# Altium PCB ETRX_Shield_gran.PcbDoc (part 2 of 2)
Units mm, origin at the board's own origin, x right, y up, seen from the top; angles counter-clockwise.
Board outline 80 x 60 mm, 4 copper layers (Top Layer, GND, PWR, Bottom Layer), stack 1.506 mm thick; 134 components, 122 nets, 503 pads, 34 vias.
Unrouted connection lines stored in the file: 347.
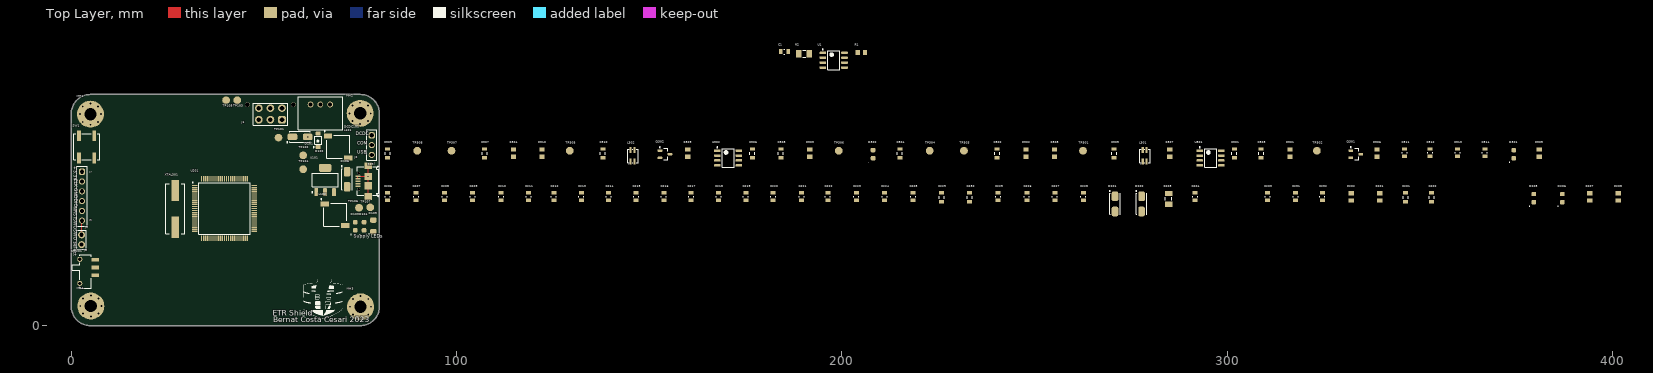
[diagram p0: Top Layer view]

## Part data (continued)
L301 L302: library part CMC-51uH-125mA, "Common Mode Noise Filter for CAN DCMR Class3 Compliance", Supplier Part Number 1=81-DLW32SH510XF2L, Specifications sheet=https://www.murata.com/products/productdata/8804914298910/QFLC9127.pdf?1681702277000, Supplier 1=Mouser
Q301 Q302: library part TRT-NPN-0.5/45-SOT23, "ON Semi BC817-25LT1G NPN Bipolar Transistor; 0.5 A; 45 V; 3-Pin SOT-23", Case/Package=SOT-23-3, Collector Base Voltage (VCBO)=50V, Collector Emitter Breakdown Voltage=45V, Collector Emitter Saturation Voltage=700mV, Current Rating=500mA, Emitter Base Voltage (VEBO)=5V, Frequency=100MHz, Package Quantity=1, Power Dissipation=300mW, Supplier Part Number 1=BC817-25LT1GOSCT-ND, .Creator=GP, Category=Transistor, Collector Emitter Voltage (VCEO)=45V, Collector-emitter Voltage-Max=700mV, ComponentLink1Description=Datasheet, ComponentLink2Description="Where buy it", ComponentLink3Description=https://datasheet.ciiva.com/27748/2010413-27748829.pdf?src-supplier=Jameco, ComponentLink3URL=https://datasheet.ciiva.com/27748/2010413-27748829.pdf?src-supplier=Jameco, ComponentLink4Description=https://datasheet.ciiva.com/15138/getdatasheetpartid-38405-15138602.pdf?src-supplier=Verical, ComponentLink4URL=https://datasheet.ciiva.com/15138/getdatasheetpartid-38405-15138602.pdf?src-supplier=Verical, ComponentLink5Description=https://datasheet.ciiva.com/1196/bc817-16lt1-d-1196558.pdf?src-supplier=Element14, ComponentLink5URL=https://datasheet.ciiva.com/1196/bc817-16lt1-d-1196558.pdf?src-supplier=Element14, ComponentLink6Description=https://datasheet.ciiva.com/22641/bc817-16lt1-d-22641013.pdf?src-supplier=Farnell, ComponentLink6URL=https://datasheet.ciiva.com/22641/bc817-16lt1-d-22641013.pdf?src-supplier=Farnell, ComponentLink7Description=https://datasheet.ciiva.com/22664/bc817-16lt1-d-22664204.pdf?src-supplier=Element14, ComponentLink7URL=https://datasheet.ciiva.com/22664/bc817-16lt1-d-22664204.pdf?src-supplier=Element14, ComponentLink8Description=https://datasheet.ciiva.com/22664/1842041-22664101.pdf?src-supplier=Element14, ComponentLink8URL=https://datasheet.ciiva.com/22664/1842041-22664101.pdf?src-supplier=Element14, ComponentLink9Description=https://datasheet.ciiva.com/4722/bc817-16lt1-d-104560-4722229.pdf?src-supplier=Mouser, ComponentLink9URL=https://datasheet.ciiva.com/4722/bc817-16lt1-d-104560-4722229.pdf?src-supplier=Mouser, ComponentLink10Description=https://datasheet.ciiva.com/1195/bc817-16lt1-d-1195763.pdf?src-supplier=Element14, ComponentLink10URL=https://datasheet.ciiva.com/1195/bc817-16lt1-d-1195763.pdf?src-supplier=Element14, ComponentLink11Description=https://datasheet.ciiva.com/1195/bc817-16lt1-d-1195764.pdf?src-supplier=Element14, ComponentLink11URL=https://datasheet.ciiva.com/1195/bc817-16lt1-d-1195764.pdf?src-supplier=Element14, ComponentLink12Description=https://datasheet.ciiva.com/11197/bc817-16lt1-d-11197514.pdf?src-supplier=Avnet, ComponentLink12URL=https://datasheet.ciiva.com/11197/bc817-16lt1-d-11197514.pdf?src-supplier=Avnet, ComponentLink13Description=https://datasheet.ciiva.com/25996/bc817-16lt1-d-25996327.pdf?src-supplier=Avnet+Europe, ComponentLink13URL=https://datasheet.ciiva.com/25996/bc817-16lt1-d-25996327.pdf?src-supplier=Avnet+Europe, ComponentLink14Description=https://datasheet.ciiva.com/976/bc817-16lt1-d-976357.pdf?src-supplier=Digi-Key, ComponentLink14URL=https://datasheet.ciiva.com/976/bc817-16lt1-d-976357.pdf?src-supplier=Digi-Key, ComponentLink15Description=https://datasheet.ciiva.com/976/bc817-16lt1-d-976358.pdf?src-supplier=Digi-Key, ComponentLink15URL=https://datasheet.ciiva.com/976/bc817-16lt1-d-976358.pdf?src-supplier=Digi-Key, ComponentLink16Description=https://datasheet.ciiva.com/976/bc817-16lt1-d-976356.pdf?src-supplier=Digi-Key, ComponentLink16URL=https://datasheet.ciiva.com/976/bc817-16lt1-d-976356.pdf?src-supplier=Digi-Key, Contact Plating=Tin,Matte, Element Configuration=Single, Gain Bandwidth Product=100MHz, Halogen Free="Halogen Free", Height=0.94mm, hFE Min=160, Lead Free="Lead Free", Length=2.9mm, Max Breakdown Voltage=45V, Max Collector Current=500mA, Max Frequency=100MHz, Number of Elements=1, Number of Pins=3, Pricing 1="1=0,20000, 10=0,18500, 100=0,10080, 500=0,06204, 1000=0,04229 (USD)", Radiation Hardening=No, REACH SVHC="No SVHC", RoHS Compliant=Yes, Series=-, Supplier 1=Digi-Key, Transition Frequency=100MHz, Width=1.3mm
R1: library part "R549k - 0805"
R2: library part R68k-1206FTK, "Resistor, AS 1206 68k1% 250mW TC100", Manufacturer=Bourns, Resistance=68kR, Supplier Part Number 1=16AH0632, .Creator=DO, Category="Chip SMD Resistors", ComponentLink1Description="Where buy it", ComponentLink1URL=https://www.mouser.es/ProductDetail/Bourns/CR1206AFX-6802EAS?qs=PzGy0jfpSMtMA5jyzS7M7w%3D%3D, ComponentLink2Description=Datasheet, ComponentLink2URL=https://www.mouser.es/datasheet/2/54/cr_a_as-1858644.pdf, Manufacturer part number=CR1206AFX-6802EAS, Pricing 1="1=0,01100, 25=0,01100, 50=0,01100, 100=0,01100, 250=0,01100, 500=0,01100 (USD)", RoHS=Yes, Stock 1=4700, Supplier 1=Newark
R101 R103 R305 R308: library part R470-0805FTK, "Res Thick Film 0805 470 Ohm 1% 1/8W ±100ppm/°C Molded SMD SMD Paper Tape on Plastic Reel", Case Code (Imperial)=0805, Case Code (Metric)=2012, Manufacturer 1=Bourns, Max Operating Temperature=155°C, Max Power Dissipation=125mW, Min Operating Temperature=-55°C, Resistance=470R, Resistance Tolerance=1%, Resistor Type="Thick Film", Temperature Coefficient=100ppm/°C, Voltage Rating=150V, .Creator=DR, Case/Package=0805, Category="Chip SMD Resistors", ComponentLink1Description=https://datasheet.ciiva.com/11808/0900766b80fcdb72-11808686.pdf?src-supplier=RSComponents, ComponentLink1URL=https://datasheet.ciiva.com/11808/0900766b80fcdb72-11808686.pdf?src-supplier=RSComponents, ComponentLink2Description=https://datasheet.ciiva.com/7985/1856384-7985880.pdf?src-supplier=Element14, ComponentLink2URL=https://datasheet.ciiva.com/7985/1856384-7985880.pdf?src-supplier=Element14, ComponentLink3Description=https://datasheet.ciiva.com/22693/1902866-22693247.pdf?src-supplier=Element14, ComponentLink3URL=https://datasheet.ciiva.com/22693/1902866-22693247.pdf?src-supplier=Element14, ComponentLink4Description=https://datasheet.ciiva.com/5541/chpreztr-5541930.pdf?src-supplier=Mouser, ComponentLink4URL=https://datasheet.ciiva.com/5541/chpreztr-5541930.pdf?src-supplier=Mouser, Construction=Rectangular, Contact Plating=Tin, Depth=1.25mm, Features="Moisture Resistant", Height=0.5mm, Length=2mm, Manufacturer Part Number 1=CR0805-FX-4700GLF, Military Standard=Not, Mount="Surface Mount", Number of Pins=2, Number of Terminations=2, Packaging="Tape and Reel", Power Rating=125mW, Pricing 1="1=0,00990, 10=0,00980, 25=0,00950, 50=0,00940, 100=0,00930, 250=0,00920, 500=0,00910, 1000=0,00890, 3000=0,00870, 6000=0,00860 (USD)", Radiation Hardening=No, REACH SVHC="No SVHC", RoHS=Yes, Series=CR0805, Stock 1=12623, Supplier 1="Arrow Electronics", Supplier Part Number 1=CR0805-FX-4700GLF, Technology="THICK FILM", Termination=SMD/SMT, Thickness=508um, Tolerance=1%, Voltage Rating (DC)=150V
R102 R207 R208: library part R100-0805FTK, "Res Thick Film 0805 100 Ohm 1% 1/8W ±100ppm/°C Molded SMD SMD Paper Tape on Plastic Reel", Case Code (Imperial)=0805, Case Code (Metric)=2012, Manufacturer 1=Bourns, Max Operating Temperature=155°C, Max Power Dissipation=125mW, Min Operating Temperature=-55°C, Package Quantity=1, Resistance=100R, Resistance Tolerance=1%, Resistor Type="Thick Film", Temperature Coefficient=100ppm/°C, Voltage Rating=150V, .Creator=DR, Case/Package=0805, Category="Chip SMD Resistors", ComponentLink1Description=https://datasheet.ciiva.com/11809/0900766b80fcdb72-11809178.pdf?src-supplier=RSComponents, ComponentLink1URL=https://datasheet.ciiva.com/11809/0900766b80fcdb72-11809178.pdf?src-supplier=RSComponents, ComponentLink2Description=https://datasheet.ciiva.com/6547/chpreztr-6547413.pdf?src-supplier=Digi-Key, ComponentLink2URL=https://datasheet.ciiva.com/6547/chpreztr-6547413.pdf?src-supplier=Digi-Key, ComponentLink3Description=https://datasheet.ciiva.com/6547/chpreztr-6547414.pdf?src-supplier=Digi-Key, ComponentLink3URL=https://datasheet.ciiva.com/6547/chpreztr-6547414.pdf?src-supplier=Digi-Key, ComponentLink4Description=https://datasheet.ciiva.com/6547/chpreztr-6547415.pdf?src-supplier=Digi-Key, ComponentLink4URL=https://datasheet.ciiva.com/6547/chpreztr-6547415.pdf?src-supplier=Digi-Key, ComponentLink5Description=https://datasheet.ciiva.com/9120/chpreztr-9120744.pdf?src-supplier=Avnet, ComponentLink5URL=https://datasheet.ciiva.com/9120/chpreztr-9120744.pdf?src-supplier=Avnet, Construction=Rectangular, Contact Plating=Tin, Depth=1.25mm, Features="Moisture Resistant", Height=0.5mm, Length=2mm, Manufacturer Part Number 1=CR0805-FX-1000ELF, Military Standard=Not, Mount="Surface Mount", Number of Pins=2, Number of Terminations=2, Packaging="Tape and Reel", Power Rating=125mW, Pricing 1="1=0,05840, 10=0,03430, 25=0,01780, 100=0,00750, 250=0,00560, 500=0,00490, 3000=0,00470 (USD)", Radiation Hardening=No, REACH SVHC="No SVHC", RoHS=Yes, RoHS Compliant=Yes, Series=CR0805, Stock 1=49802, Supplier 1="Arrow Electronics", Supplier Part Number 1=CR0805-FX-1000ELF, Technology="THICK FILM", Termination=SMD/SMT, Thickness=508um, Tolerance=1%, Voltage Rating (DC)=150V, Width=1.25mm
R201: library part R620k-0805FTK
R202: library part R430k-0805FTK
R203: library part R1.6K-1206FTK, "Res Thick Film 1206 1.6K Ohm 1% 1/4W ±100ppm/°C Molded SMD SMD Paper T/R", Case Code (Imperial)=1206, Case Code (Metric)=3216, Manufacturer 1=Vishay, Max Operating Temperature=155°C, Max Power Dissipation=250mW, Min Operating Temperature=-55°C, Package Quantity=5000, Resistance=1k6, Resistance Tolerance=1%, Resistor Type="Thick Film", Supplier Part Number 1=541-1.60KFCT-ND, Temperature Coefficient=100ppm/°C, Voltage Rating=200V, .Creator=DO, Case/Package=1206, Category="Chip SMD Resistors", ComponentLink1Description=https://datasheet.ciiva.com/11811/0900766b80d98b5e-11811377.pdf?src-supplier=RSComponents, ComponentLink1URL=https://datasheet.ciiva.com/11811/0900766b80d98b5e-11811377.pdf?src-supplier=RSComponents, ComponentLink2Description=https://datasheet.ciiva.com/2515/dcrcwe3-2515616.pdf?src-supplier=Digi-Key, ComponentLink2URL=https://datasheet.ciiva.com/2515/dcrcwe3-2515616.pdf?src-supplier=Digi-Key, ComponentLink3Description=https://datasheet.ciiva.com/2515/dcrcwe3-2515617.pdf?src-supplier=Digi-Key, ComponentLink3URL=https://datasheet.ciiva.com/2515/dcrcwe3-2515617.pdf?src-supplier=Digi-Key, ComponentLink4Description=https://datasheet.ciiva.com/2515/dcrcwe3-2515618.pdf?src-supplier=Digi-Key, ComponentLink4URL=https://datasheet.ciiva.com/2515/dcrcwe3-2515618.pdf?src-supplier=Digi-Key, ComponentLink5Description=https://datasheet.ciiva.com/9098/dcrcwe3-9098889.pdf?src-supplier=Avnet, ComponentLink5URL=https://datasheet.ciiva.com/9098/dcrcwe3-9098889.pdf?src-supplier=Avnet, ComponentLink6Description=https://datasheet.ciiva.com/16213/dcrcwe3-16213498.pdf?src-supplier=Future+Electronics, ComponentLink6URL=https://datasheet.ciiva.com/16213/dcrcwe3-16213498.pdf?src-supplier=Future+Electronics, ComponentLink7Description=https://datasheet.ciiva.com/17203/dcrcwe3-17203786.pdf?src-supplier=Avnet+Europe, ComponentLink7URL=https://datasheet.ciiva.com/17203/dcrcwe3-17203786.pdf?src-supplier=Avnet+Europe, ComponentLink8Description=https://datasheet.ciiva.com/7670/1697337-7670316.pdf?src-supplier=Element14, ComponentLink8URL=https://datasheet.ciiva.com/7670/1697337-7670316.pdf?src-supplier=Element14, ComponentLink9Description=https://datasheet.ciiva.com/7670/1697337-7670317.pdf?src-supplier=Element14, ComponentLink9URL=https://datasheet.ciiva.com/7670/1697337-7670317.pdf?src-supplier=Element14, ComponentLink10Description=https://datasheet.ciiva.com/5550/dcrcwe3-109170-5550718.pdf?src-supplier=Mouser, ComponentLink10URL=https://datasheet.ciiva.com/5550/dcrcwe3-109170-5550718.pdf?src-supplier=Mouser, ComponentLink11Description=RS, ComponentLink11URL=https://es.rs-online.com/web/p/resistencias-fijas-para-montaje-en-superficie/6791866/, Construction=Rectangular, Contact Plating=Tin, Depth=1.6mm, Features="Automotive AEC-Q200", Height=0.55mm, Lead Free="Lead Free", Length=3.2mm, Manufacturer Part Number 1=CRCW12061K60FKEA, Military Standard=Not, Number of Pins=2, Number of Terminations=2, Packaging="Tape and Reel", Power Rating=250mW, Pricing 1="1=0,10000, 10=0,08200, 100=0,03160, 1000=0,01392, 2500=0,01202 (USD)", Radiation Hardening=No, REACH SVHC=Unknown, RoHS=Yes, RoHS Compliant=Yes, Series=CRCW, Size Code=1206, Supplier 1=Digi-Key, Technology="THICK FILM", Termination=SMD/SMT, Tolerance=1%, Voltage Rating (DC)=200V, Weight=0.000353oz, Width=0.063inch
R301 R302 R303 R304: "Res Thin Film 0805 60.4 Ohm 0.1% 1/8W ±25ppm/°C Molded SMD SMD Punched Carrier T/R", Case Code (Imperial)=0805, Case Code (Metric)=2012, Manufacturer 1=Panasonic, Manufacturer Part Number 1=ERA-6AEB60R4V, Max Operating Temperature=155°C, Max Power Dissipation=125mW, Min Operating Temperature=-55°C, Package Quantity=5000, Resistance=60.4R, Resistor Type="Thin Film,Metal Film", Temperature Coefficient=25ppm/°C, Tolerance=0.1%, Voltage Rating=200V, Voltage Rating (DC)=100V, .Creator=DR, Case/Package=0805, Category="Chip SMD Resistors", ComponentLink1Description=https://datasheet.ciiva.com/11811/0900766b80eb1d8c-11811180.pdf?src-supplier=RSComponents, ComponentLink1URL=https://datasheet.ciiva.com/11811/0900766b80eb1d8c-11811180.pdf?src-supplier=RSComponents, ComponentLink2Description=https://datasheet.ciiva.com/41450/001181146-da-01-en-widerstand-era-0805-60r4-0-1-5000st-41450303.pdf?src-supplier=Conrad, ComponentLink2URL=https://datasheet.ciiva.com/41450/001181146-da-01-en-widerstand-era-0805-60r4-0-1-5000st-41450303.pdf?src-supplier=Conrad, ComponentLink3Description=https://datasheet.ciiva.com/5951/485442-5951173.pdf?src-supplier=Farnell, ComponentLink3URL=https://datasheet.ciiva.com/5951/485442-5951173.pdf?src-supplier=Farnell, ComponentLink4Description=https://datasheet.ciiva.com/30184/54aoa0000ce26-30184022.pdf?src-supplier=Onlinecomponents.com, ComponentLink4URL=https://datasheet.ciiva.com/30184/54aoa0000ce26-30184022.pdf?src-supplier=Onlinecomponents.com, ComponentLink5Description=https://datasheet.ciiva.com/9188/aoa0000ce26-9188476.pdf?src-supplier=Avnet, ComponentLink5URL=https://datasheet.ciiva.com/9188/aoa0000ce26-9188476.pdf?src-supplier=Avnet, Contact Plating=Tin, Depth=1.25mm, Features="Automotive AEC-Q200", Height=0.5mm, Lead Free="Lead Free", Length=2mm, Mount="Surface Mount", Number of Pins=2, Number of Terminations=2, Packaging="Tape and Reel", Power Rating=125mW, Pricing 1="1=0,04650, 10=0,03900, 100=0,02860 (USD)", Radiation Hardening=No, RoHS=Yes, Stock 1=5000, Supplier 1="Arrow Electronics", Supplier Part Number 1=ERA-6AEB60R4V, Termination=SMD/SMT, Weight=0.000194oz, Width=1.25mm
R306 R309: library part R47kR-0805FTK
R307 R310: library part R22k-0805FTK
SW1: "WS-TASV J-Hook SMT Hermetic Tact Switch, L6 x W6 x H3.4mm, 250g, SPST-NO, 12V, 50mA", Manufacturer="Wurth Elektronik", Operating Temperature Max=85°C, Operating Temperature Min=-40°C, Rated Current=50mA, Rated Voltage (DC)=12V, Category="Tact Switches", Circuit=SPST-NO, ComponentLink1Description="Website Link", ComponentLink1URL=https://www.we-online.com/redexpert/article/430773034825?ad, ComponentLink2Description="Datasheet Link", ComponentLink2URL=https://www.we-online.com/redexpert/spec/430773034825?ad, Contact Material="Stainless Steel", Contact Plating=Silver, Height=3.4mm, Length=6mm, Manufacturer part number=430773034825, Match Code=WS-TASV, Mount="Surface Mount", Operation Force=250g, Packaging="Tape and Reel", Terminal Material="Copper Alloy", Terminal Plating=Silver, Washable=Yes, Width=6mm
SW201: "WS-SLSU SMT Mini Slide Switch Same Side Connection, SPDT, 5VDC, 300mA, 225g", Manufacturer="Wurth Elektronik", Operating Temperature Max=85°C, Operating Temperature Min=-40°C, Rated Current=300mA, Rated Voltage=5VDC, Category="Slide Switches", Circuit=SPDT, ComponentLink1Description="Website Link", ComponentLink1URL=https://www.we-online.com/redexpert/article/450405020524?ad, ComponentLink2Description="Datasheet Link", ComponentLink2URL=https://www.we-online.com/redexpert/spec/450405020524?ad, Contact Material="Copper Alloy", Contact Plating=Silver, Height=2mm, Length=8.7mm, Manufacturer part number=450405020524, Match Code=WS-SLSU, Mount="Surface Mount", Operation Force=225g, Packaging="Tape and Reel", Terminal Material="Copper Alloy", Terminal Plating=Silver, Width=3mm
TP101 TP102 TP103 TP104 TP105 TP106 TP107 TP301 TP302 TP303 TP304 TP305 TP306 TP307 TP308: "Test Point 1x1 mm", .Creator=GP, .PCBcheck=GP, .SCHcheck=GP, Category=TestPoint
U1: library part "EEPROM 24AA02I2C 2K Microchip", "24AA02 / 2Kb I2C compatible 2-wire Serial EEPROM", Supplier Part Number 1=24AA02-I/SN, ComponentLink1Description=Datasheet, ComponentLink1URL=https://ww1.microchip.com/downloads/aemDocuments/documents/MPD/ProductDocuments/DataSheets/24AA02-24LC02B-24FC02-2K-I2C-Serial-EEPROM-20001709N.pdf, Supplier 1="Arrow Electronics"
U101: library part LDO_10V-0.8/3V3-SOT223, "LDO Regulator Pos 3.3V 0.8A 4-Pin(3+Tab) SOT-223 T/R / IC REG LDO 3.3V 0.8A SOT223", Case/Package=SOT-223, Current Rating=800A, Dropout Voltage=1.2V, Manufacturer="Texas Instruments", Max Input Voltage=15V, Max Operating Temperature=125°C, Max Output Current=800mA, Max Supply Voltage=10V, Min Input Voltage=2.6V, Min Operating Temperature=-40°C, Min Supply Voltage=4.75V, Nominal Output Voltage=3.3V, Output Voltage Accuracy=1%, Package Quantity=1000, Quiescent Current=15mA, Supplier Part Number 1=LM1117IMP-3.3/NOPBCT-ND, .Creator=GP, Accuracy=1%, Category=LDO, ComponentLink1Description=Datasheet, ComponentLink1URL=https://www.ti.com/lit/ds/symlink/lm1117.pdf?HQS=dis-mous-null-mousermode-dsf-pf-null-wwe&DCM=yes&ref_url=https%3A%2F%2Fwww.mouser.de%2F&distId=26, ComponentLink2Description="Where buy it", ComponentLink2URL=https://www.mouser.es/ProductDetail/Texas-Instruments/LM1117IMP-33-NOPB?qs=X1J7HmVL2ZFbpN1TgOsjYQ%3D%3D, ComponentLink3Description=https://datasheet.ciiva.com/27051/1281318-27051810.pdf?src-supplier=Jameco, ComponentLink3URL=https://datasheet.ciiva.com/27051/1281318-27051810.pdf?src-supplier=Jameco, ComponentLink4Description=https://datasheet.ciiva.com/8042/1670636-8042261.pdf?src-supplier=Element14, ComponentLink4URL=https://datasheet.ciiva.com/8042/1670636-8042261.pdf?src-supplier=Element14, ComponentLink5Description=https://datasheet.ciiva.com/1570/1849796-1570171.pdf?src-supplier=Farnell, ComponentLink5URL=https://datasheet.ciiva.com/1570/1849796-1570171.pdf?src-supplier=Farnell, ComponentLink6Description=https://datasheet.ciiva.com/14149/lm1117-eng-tds-14149980.pdf?src-supplier=Distrelec, ComponentLink6URL=https://datasheet.ciiva.com/14149/lm1117-eng-tds-14149980.pdf?src-supplier=Distrelec, ComponentLink7Description=https://datasheet.ciiva.com/46386/1882372-46386042.pdf?src-supplier=Element14, ComponentLink7URL=https://datasheet.ciiva.com/46386/1882372-46386042.pdf?src-supplier=Element14, ComponentLink8Description=https://datasheet.ciiva.com/3223/lm1117-n-3223515.pdf?src-supplier=Avnet, ComponentLink8URL=https://datasheet.ciiva.com/3223/lm1117-n-3223515.pdf?src-supplier=Avnet, ComponentLink9Description=https://datasheet.ciiva.com/6580/lm1117-n-6580030.pdf?src-supplier=Digi-Key, ComponentLink9URL=https://datasheet.ciiva.com/6580/lm1117-n-6580030.pdf?src-supplier=Digi-Key, ComponentLink10Description=https://datasheet.ciiva.com/6580/lm1117-n-6580026.pdf?src-supplier=Digi-Key, ComponentLink10URL=https://datasheet.ciiva.com/6580/lm1117-n-6580026.pdf?src-supplier=Digi-Key, Height=1.6mm, Lead Free="Lead Free", Length=6.5mm, Manufacturer part number=LM1117IMP-3.3/NOPB, Min Current Limit=800mA, Mount="Surface Mount", Number of Outputs=1, Number of Pins=4, Number of Regulators=1, Output Current=800mA, Output Type=Fixed, Output Voltage=3.3V, Packaging="Tape and Reel", Polarity=Positive, Pricing 1="1=1,41000, 10=1,26300, 25=1,19920, 100=0,98500, 250=0,92072, 500=0,81366 (USD)", Radiation Hardening=No, REACH SVHC="No SVHC", RoHS=Yes, RoHS Compliant=Yes, Supplier 1=Digi-Key, Termination=SMD/SMT, Width=3.56mm
U201: "ARM Microcontrollers - MCU 16/32-BITS MICROS", Manufacturer_Name=STMicroelectronics, Mouser Part Number=511-STM32F777VIT6, Datasheet Link=https://www.st.com/resource/en/datasheet/stm32f777vi.pdf, Geometry.Height=1.6mm, Manufacturer_Part_Number=STM32F777VIT6, Mouser Price/Stock=https://www.mouser.co.uk/ProductDetail/STMicroelectronics/STM32F777VIT6?qs=qzCNEk%252BRr%252BbclRoyC9pexg%3D%3D
U301: library part "Transceiver CAN MCP2551 I/SN"
U302: library part "Transceiver CAN MCP2551 I/SN", Supplier Part Number 1=MCP2551T-I/SN, Supplier 1="Arrow Electronics"
XTAL301: library part XTAL20M_SMD, "830028710, 20 MHz", Frequency="20 MHz", Frequency Stability="+-50 ppm", Manufacturer="Würth Elektronik", Max operating temperature.=85ºC, Min Operating Temperature=-40ºC, Supplier Part Number 1=1923-830028710CT-ND, .Creator=GP, Category=XTAL, ComponentLink1Description=Datasheet, ComponentLink1URL=https://www.we-online.com/catalog/datasheet/830028710.pdf, ComponentLink2Description="Where buy it", Drive level="500µW max", Manufacturer part number=830028710, Number of Pins=2, Packaging=Reel, Pricing 1="1=0,37000, 10=0,28100, 50=0,26800, 100=0,24400, 500=0,22000 (USD)", RoHS=Yes, Stock 1=975, Supplier="Würth Elektronik", Supplier 1=Digi-Key, Type=SMD

## Via types
v1: diameter 0.7, hole 0.5, Top Layer to Bottom Layer, 32 vias
v2: diameter 0.3, hole 0.2, Top Layer to Bottom Layer, 2 vias

## Nets (pads, with @x,y where several pads share a name; then routed paths per layer and width w, separated by ;. In a path a pad name is that pad's centre, name@x,y a point inside that pad or via, vN(x,y) a via of type N, cw(c..) or ccw(c..) an arc to the next point about the centre after c; other vN are vias at no path point)
"5V supply": DCDC101.3 J101.1 TP103.1
+3.3: C105.2 C205.1 C206.1 C207.1 C208.1 C209.1 C210.1 C211.1 C212.1 C213.1 C214.1 C215.1 C216.1 C217.1 C218.1 C219.1 C220.1 C221.1 C222.1 C223.1 C224.1 J3.1 J4.1 J5.2 J6.1 J7.1 R102.1 R203.2 SW201.L1 TP104.1 U1.8 U101.2 U101.4 U201.11 U201.27 U201.50 U201.75 U201.100
+5: C104.1 C311.1 C312.1 C313.1 C314.1 J4.27 J5.6 J6.27 J7.27 J101.2 R101.1 R305.1 R308.1 U101.3 U301.3 U302.3
CAN1_H: C303.1 J1.2 L301.4 R301.2 TP302.1
CAN1_L: C304.1 J1.3 L301.3 R302.2 TP304.1
CAN1_RX: R309.1 U201.81 U301.4
CAN1_TX: R306.1 U201.82 U301.1
CAN2_H: C308.1 J1.4 L302.4 R303.2 TP306.1
CAN2_L: C309.1 J1.5 L302.3 R304.2 TP308.1
CAN2_RX: U201.51 U302.4
CAN2_TX: U201.52 U302.1
GND: C1.2 C2.1 C101.2 C102.2 C103.2 C104.2 C105.1 C106.2 C107.2 C108.2 C109.2 C201.1 C201.2 C202.1 C202.2 C203.1 C204.1 C205.2 C206.2 C207.2 C208.2 C209.2 C210.2 C211.2 C212.2 C213.2 C214.2 C215.2 C216.2 C217.2 C218.2 C219.2 C220.2 C221.2 C222.2 C223.2 C224.2 C229.1 C229.2 C230.1 C230.2 C231.2 C232.2 C301.2 C302.1 C303.2 C304.2 C305.1 C306.2 C307.1 C308.2 C309.2 C310.1 C311.2 C312.2 C313.2 C314.2 D101.1 D103.K D104.K D105.K D106.2 D201.2 D202.2 D205.K D206.K DCDC101.2 J1.6 J2.4 J2.5 J2.Shell J3.3 J4.28 J5.28 J6.23 J7.25 MH1.1 MH2.1 MH3.1 MH4.1 Q301.E Q302.E R2.2 R202.2 R307.2 R310.2 SW1.B2 SW201.L2 TP105.1 U1.4 U1.7 U101.1 U201.10 U201.26 U201.48 U201.49 U201.73 U201.74 U201.99 U301.2 U301.8 U302.2 U302.8 | length 11.3
  Top Layer w0.3: D101.1 v2(61.4,49) ; J2.4 J2.5 77,38.8 v2(77.05,38.75) 77.1,38.7 77.1,36.3 J2.Shell@77.1,33.5 ; J2.Shell@77.1,38.8 J2.Shell@77.1,41.5
  other v1: 75.1,2.15 5.1,2.35 73.1,2.9 77.1,2.9 3.1,3.1 7.1,3.1 72.35,4.9 77.85,4.9 2.35,5.1 7.85,5.1 73.1,6.9 77.1,6.9 3.1,7.1 7.1,7.1 75.1,7.65 5.1,7.85 5,52.15 75,52.35 3,52.9 7,52.9 73,53.1 77,53.1 2.25,54.9 7.75,54.9 72.25,55.1 77.75,55.1 3,56.9 7,56.9 73,57.1 77,57.1 5,57.65 75,57.85
LED_PA3: J4.9 R208.2 U201.25
LED_PE2: J4.4 R207.2 U201.1
"LV tr": C103.1 F101.1 J4.2 J5.10 J5.12 J5.14 J6.9 J6.11 J6.13 J7.2 J7.17 J7.19 J7.21 L101.2 TP102.1
"LV+ in": D101.2 D102.A J1.1 R1.1 TP101.1
NetC2_2: C2.2 SW1.B1
NetC101_1: C101.1 C102.1 D102.K L101.1
NetC109_1: C109.1 F102.1 L102.2
NetC301_1: C301.1 L301.1 TP301.1 U301.7
NetC302_2: C302.2 L301.2 TP303.1 U301.6
NetC305_2: C305.2 R301.1 R302.1
NetC306_1: C306.1 L302.1 TP305.1 U302.7
NetC307_2: C307.2 L302.2 TP307.1 U302.6
NetC310_2: C310.2 R303.1 R304.1
NetD103_A: D103.A R101.2
NetD104_A: D104.A R102.2
NetD105_A: D105.A R103.1
NetD205_A: D205.A R207.1
NetD206_A: D206.A R208.1
NetD301_A: D301.A R305.2
NetD301_K: D301.K Q301.C
NetD302_A: D302.A R308.2
NetD302_K: D302.K Q302.C
NetDCDC101_1: DCDC101.1 F101.2
NetJ3_6: J3.6 J8.2 | length 3.7
  Top Layer w0.3: J8.2 2.75,23.62 2.75,27.19 J3.6
NetQ301_B: Q301.B R306.2 R307.1
NetQ302_B: Q302.B R309.2 R310.1
NetSW201_COM: SW201.COM U201.94
NRST: J3.5 SW1.A1 SW1.A2 U201.14
OSC_IN: C203.2 U201.12 XTAL301.2
OSC_OUT: C204.2 U201.13 XTAL301.1
PA0: J4.3 U201.22
PA1: J4.5 U201.23
PA2: J4.7 U201.24
PA4: J4.25 U201.28
PA5: J4.23 U201.29
PA6: J4.21 U201.30
PA7: J4.19 U201.31
PA8: J6.4 U201.67
PA10: J6.2 U201.69
PA15: J7.28 U201.77
PB0: J5.1 U201.34
PB1: J5.3 U201.35
PB2: J5.5 U201.36
PB3: J7.20 J8.1 U201.89
PB4: J7.18 U201.90
PB5: J7.16 U201.91
PB6: J7.14 U201.92
PB7: J7.12 U201.93
PB8: J7.10 U201.95
PB9: J7.8 U201.96
PB10: J5.25 U201.46
PB11: J5.27 U201.47
PB14: J6.28 U201.53
PB15: J6.26 U201.54
PC0: J4.26 U201.15
PC1: J4.24 U201.16
PC2: J4.22 U201.17
PC3: J4.20 U201.18
PC4: J5.18 U201.32
PC5: J5.16 U201.33
PC6: J6.12 U201.63
PC7: J6.10 U201.64
PC8: J6.8 U201.65
PC9: J6.6 U201.66
PC10: J7.26 U201.78
PC11: J7.24 U201.79
PC12: J7.22 U201.80
PC13: J4.14 U201.7
PC14: J4.16 U201.8
PC15: J4.18 U201.9
PD2: J7.13 U201.83
PD3: J7.11 U201.84
PD4: J7.9 U201.85
PD5: J7.7 U201.86
PD6: J7.5 U201.87
PD7: J7.3 U201.88
PD8: J6.24 U201.55
PD9: J6.22 U201.56
PD10: J6.20 U201.57
PD11: J6.18 U201.58
PD12: U1.6 U201.59
PD13: U1.5 U201.60
PD14: J6.16 U201.61
PD15: J6.14 U201.62
PE0: J7.4 U201.97
PE1: J7.6 U201.98
PE3: J4.6 U201.2
PE4: J4.8 U201.3
PE5: J4.10 U201.4
PE6: J4.12 U201.5
PE7: J5.7 U201.37
PE8: J5.9 U201.38
PE9: J5.11 U201.39
PE10: J5.13 U201.40
PE11: J5.15 U201.41
PE12: J5.17 U201.42
PE13: J5.19 U201.43
PE14: J5.21 U201.44
PE15: J5.23 U201.45
SYS_JTMS-SWCLK: J3.2 U201.76
SYS_JTMS-SWDIO: J3.4 U201.72
USB_5V: F102.2 J101.3 R103.2 TP107.1
USB_OTG_H: D201.1 J2.3 R203.1 U201.71
USB_OTG_L: D202.1 J2.2 U201.70
USB_OTG_VBUS: C231.1 C232.1 R201.2 R202.1 U201.68
USB_VBUS: C106.1 C107.1 C108.1 D106.1 J2.1 L102.1 R201.1 TP106.1
VBAT: C1.1 R1.2 R2.1 U201.6
VDDA: C225.2 C226.2 C227.2 C228.2 J4.17 U201.21
VREFA: C227.1 C228.1 J4.15 U201.20
VSSA: C225.1 C226.1 J4.13 U201.19
pads on no net: J1.7 J2.MH1 J2.MH2 J4.11 J5.4 J5.8 J5.20 J5.22 J5.24 J5.26 J6.3 J6.5 J6.7 J6.15 J6.17 J6.19 J6.21 J6.25 J7.15 J7.23 SW201.MH1 SW201.MH2 U1.1 U1.2 U1.3 U301.5 U302.5

## Silkscreen, mask and mechanical layers (free items; w line width, h text height)
Top Overlay:
  drawing of 8 lines, arcs and shapes, not listed
  text "DCDC" at 73.801,49 h1.52
  text "COM" at 74.2,46.6 h1.52
  text "USB" at 74.301,44.2 h1.52
  text "+3.3V" at 0.3,41.4 h1.52 r270
  text "CLK" at 0.4,38.1 h1.52 r270
  text "GND" at 0.4,35.6 h1.52 r270
  text "DIO" at 0.4,32.999 h1.52 r270
  text "NRST" at 0.3,30.799 h1.52 r270
  text "SWO" at 0.3,27.899 h1.52 r270
  text "SWO select" at 0.3,24.999 h1.52 r270
  text "Supply LEDs" at 73.301,22.393 h1.52
  text "ETR Shield" at 52.302,2 h2.5
  text "Bernat Costa Cesari 2023" at 52.409,0.4 h2.5
Mechanical 1:
  the board outline again, w0.1

## Text inside footprints (layer, text, board x,y; h text height)
J2: Top Component Outline "PCB Edge" at 79.2,36.3 h1 r90
J3: Top Overlay "1" at 4.5,40.06 h1 r270; Top Overlay "6" at 4.5,27.62 h1 r270
J4: Bottom Overlay "28" at 24.6,20.78 h1 r90; Bottom Overlay "27" at 28.4,20.78 h1 r90; Bottom Overlay "2" at 24.6,39.92 h1 r90; Bottom Overlay "1" at 28.4,39.52 h1 r90
J5: Bottom Overlay "28" at 47.22,16.6 h1 r180; Bottom Overlay "27" at 47.22,20.4 h1 r180; Bottom Overlay "2" at 28.08,16.6 h1 r180; Bottom Overlay "1" at 28.48,20.4 h1 r180
J6: Bottom Overlay "28" at 51.6,20.78 h1 r90; Bottom Overlay "27" at 55.4,20.78 h1 r90; Bottom Overlay "2" at 51.6,39.92 h1 r90; Bottom Overlay "1" at 55.4,39.52 h1 r90
J7: Bottom Overlay "28" at 47.22,41.6 h1 r180; Bottom Overlay "27" at 47.22,45.4 h1 r180; Bottom Overlay "2" at 28.08,41.6 h1 r180; Bottom Overlay "1" at 28.48,45.4 h1 r180